# Altium PCB PCB robot V3.PCBDOC (part 3 of 3)
Units mm, origin at the board's own origin, x right, y up, seen from the top; angles counter-clockwise.
Board outline 299.72 x 199.9 mm, 2 copper layers (Top Layer, Bottom Layer); 127 components, 116 nets, 527 pads, 274 vias.
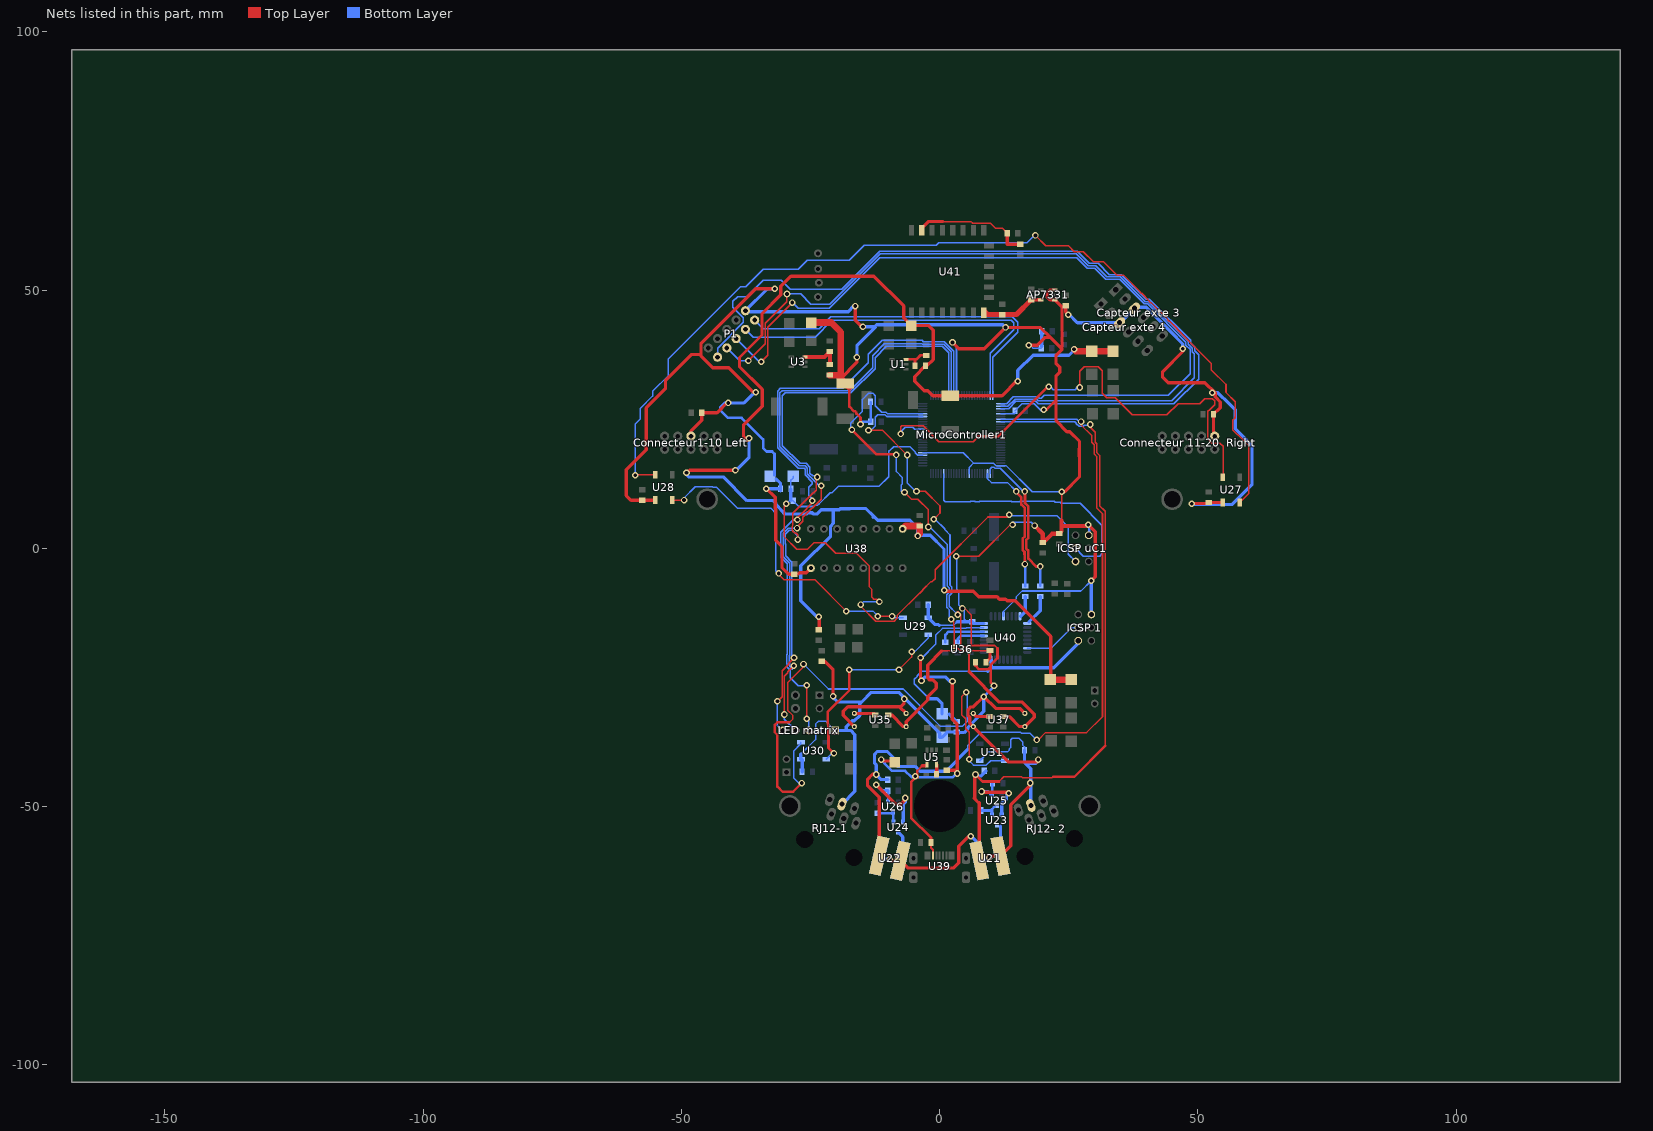
[diagram p3: the nets of this part, all layers, seen from the top]

## Via types
v1: diameter 1.27, hole 0.711, Top Layer to Bottom Layer, 274 vias

## Nets (pads, with @x,y where several pads share a name; then routed paths per layer and width w, separated by ;. In a path a pad name is that pad's centre, name@x,y a point inside that pad or via, vN(x,y) a via of type N, cw(c..) or ccw(c..) an arc to the next point about the centre after c; other vN are vias at no path point) (continued)
NetMicroController1_40: MicroController1.40 U27.din | length 102.1
  Top Layer w0.254: v1(-7.523,22.145) -7.523,23.576 -7.342,23.757 -3.22,23.757 -0.137,20.674 6.451,20.674 7.451,21.674 ; v1@20.864,31.267 v1(21.124,31.267) ; v1(27.127,31.134) 27.127,34.294 27.946,35.112 30.732,35.112 31.423,34.422 31.423,30.021 32.343,29.101 33.996,29.101 37.275,25.822 43.956,25.822 46.16,28.026 50.366,28.026 51.334,28.994 52.738,28.994 53.203,28.529 53.203,27.755 52.32,26.872 52.251,26.872 51.899,26.52 51.899,22.229 51.908,22.22 51.908,21.211 51.899,21.202 52.713,20.388 54.214,20.388 54.843,19.76 54.843,13.808 U27.din@54.8,13.765
  Top Layer w0.5: 7.451,21.674 11.271,21.674 v1@20.864,31.267
  Bottom Layer w0.254: v1@-7.61,22.451 -6.627,23.434 -5.217,23.434 -4.835,23.052 -3.325,23.052 MicroController1.40@-3.295,23.022 ; v1(21.124,31.267) 21.455,31.267 22.023,30.699 26.23,30.699 26.665,31.134 v1(27.127,31.134)
NetMicroController1_45: MicroController1.45 U36.7 | length 67.6
  Top Layer w0.305: v1(-13.787,22.842) -11.082,22.842 -6.306,18.066 v1(-6.271,18.066) ; v1(-4.493,11.036) -2.771,11.036 0.052,8.213 0.052,6.82 v1(-1.156,5.612) ; v1(3.517,-12.886) 3.395,-12.886 3.234,-12.725 3.234,-12.511 3.494,-12.251 4.086,-12.842 4.086,-18.712 4.462,-19.088 4.941,-19.088 5.157,-19.304 5.262,-19.304
  Bottom Layer w0.305: v1@-13.409,22.784 -12.491,23.701 -12.491,25.391 -12.014,25.868 -10.592,25.868 -10.245,25.522 MicroController1.45@-3.295,25.522 ; v1(-6.271,18.066) -6.271,12.651 v1@-4.731,11.11 ; v1@-0.84,5.593 0.965,3.787 0.965,3.626 1.99,2.601 1.99,-7.158 2.325,-7.493 2.325,-8.712 1.854,-9.183 1.854,-11.191 v1@3.177,-12.515
NetMicroController1_46: MicroController1.46 U36.1 | length 74.2
  Top Layer w0.305: v1(-6.814,10.86) -5.44,9.487 -4.226,9.487 -2.183,7.444 v1(-2.183,4.131) ; v1(2.235,-13.76) 2.76,-14.285 2.76,-15.047 2.78,-15.067 U36.1@2.78,-18.81
  Top Layer w0.5: v1(-16.989,22.922) -12.256,18.189 v1@-8.959,18.189
  Bottom Layer w0.305: v1@-17.214,22.961 -17.214,24.273 -14.957,26.529 -14.957,28.822 -13.728,30.051 -12.959,30.051 -12.451,29.543 -12.451,27.593 -11.221,26.363 -10.387,26.363 -10.045,26.022 MicroController1.46@-3.295,26.022 ; v1(-8.38,18.076) -8.38,14.861 -7.285,13.766 -7.285,12.384 -7.417,12.253 -7.417,11.006 -7.271,10.86 v1(-6.814,10.86) ; v1@-2.036,4.22 1.495,0.689 1.495,-7.363 1.83,-7.698 1.83,-8.507 1.359,-8.978 1.359,-11.396 1.823,-11.86 v1@1.823,-13.348
NetMicroController1_58: "LED matrix.5" MicroController1.58 | length 125.3
  Top Layer w0.254: v1@-31.445,-29.603 v1(-31.406,-29.603) -31.327,-29.603 -30.499,-28.775 -30.499,-23.693 -29.231,-22.425 -29.231,-22.235 v1(-28.198,-21.202) ; -30.499,-35.156 -30.396,-35.259 ; v1(-27.458,1.692) -27.458,2.653 -27.728,2.924 -27.994,2.924 -28.401,3.331 -28.401,3.363 -28.567,3.529 -28.567,4.319 -28.401,4.485 -28.401,5.023 -28.487,5.109 -28.487,5.9 -28.401,5.986 -28.401,6.785 -25.039,10.147 -25.033,10.147 -23.927,11.254 -23.927,13.561 v1(-23.681,13.807)
  Bottom Layer w0.254: v1(-31.406,-29.603) -31.406,-34.249 -30.396,-35.259 ; v1@-28.622,-21.29 -28.622,-2.658 -29.824,-1.455 -29.824,0.823 -29.862,0.861 -29.862,2.747 -29.129,3.48 -28.515,3.48 -27.458,2.423 v1(-27.458,1.692) ; v1@-23.705,13.512 -24.196,14.003 -24.594,14.003 -25.166,14.574 -25.166,15.72 -25.877,16.431 -27.022,16.431 -30.47,19.878 -30.47,29.53 -29.926,30.074 -17.244,30.074 -12.522,34.797 -12.522,36.899 -10.317,39.104 0.513,39.104 1.711,37.906 1.755,37.906 MicroController1.58@1.755,29.572
NetMicroController1_59: "LED matrix.4" MicroController1.59 | length 124
  Top Layer w0.254: v1(-30.052,-32.173) -30.052,-24.717 -29.415,-24.081 -29.415,-23.864 v1(-28.277,-22.726) v1@-28.277,-22.682 ; v1@-28.278,-22.726 v1@-28.278,-22.682 ; -27.236,4.452 -26.482,5.205 -26.482,5.975 -22.946,9.511 v1(-22.946,12.13)
  Bottom Layer w0.254: v1(-30.052,-32.173) -30.052,-33.063 -27.856,-35.259 ; -28.471,-23.377 -28.498,-23.377 -29.055,-22.82 -29.055,-22.259 -29.15,-22.165 -29.15,-20.808 -29.066,-20.723 -29.066,-2.842 -30.268,-1.639 -30.268,0.64 -30.306,0.677 -30.306,2.931 -29.313,3.924 v1(-27.613,3.924) v1@-27.738,3.798 ; v1@-22.932,11.883 -23.107,11.883 -25.613,14.389 -25.613,15.535 -26.062,15.984 -27.207,15.984 -30.917,19.693 -30.917,30.083 -30.479,30.521 -17.43,30.521 -12.969,34.982 -12.969,37.312 -10.719,39.562 -3.359,39.562 -3.349,39.551 0.743,39.551 2.255,38.039 MicroController1.59@2.255,29.572
NetMicroController1_60: "LED matrix.3" MicroController1.60 | length 125.4
  Top Layer w0.254: v1(-27.533,5.505) -27.533,5.893 -26.745,6.68 -26.745,6.695 -24.63,8.811 -24.643,8.824 v1(-24.643,9.192) ; v1(-25.76,-26.493) -25.76,-32.608 v1@-25.414,-32.955
  Bottom Layer w0.254: v1(-27.533,5.505) -28.373,5.505 -30.187,3.691 -30.187,3.678 -30.75,3.115 -30.75,0.493 -30.712,0.456 -30.712,-1.823 -29.51,-3.025 -29.51,-20.539 -29.594,-20.624 -29.594,-22.349 -29.499,-22.443 -29.499,-23.004 -28.915,-23.589 -28.915,-25.012 -27.357,-26.57 v1@-25.645,-26.57 ; v1(-25.76,-33.013) -25.316,-33.457 -25.316,-35.259 ; v1@-24.947,8.789 -24.694,9.042 -24.694,9.643 -25.341,10.291 -25.341,11.823 -24.694,12.471 -24.694,12.838 -26.06,14.204 -26.06,15.349 -26.247,15.537 -27.393,15.537 -31.364,19.508 -31.364,30.445 -30.84,30.968 -18.728,30.968 -13.815,35.882 -13.815,37.571 -11.139,40.247 -3.413,40.247 -3.164,39.998 0.928,39.998 2.755,38.171 MicroController1.60@2.755,29.572
NetMicroController1_74: MicroController1.74 P1.7 | length 70
  Bottom Layer w0.254: P1.7@-37.612,42.388 -36.13,40.906 -24.133,40.906 -20.926,44.114 13.851,44.114 14.289,43.676 14.289,42.294 9.755,37.76 MicroController1.74@9.755,29.572
NetMicroController1_75: MicroController1.75 P1.9 | length 69.2
  Bottom Layer w0.254: P1.9@-35.816,44.184 -34.181,42.549 -23.333,42.549 -21.053,44.829 14.048,44.829 15.091,43.786 15.091,41.813 10.255,36.977 MicroController1.75@10.255,29.572
NetMicroController1_76: MicroController1.76 P1.5 | length 153.9
  Top Layer w0.254: v1(-34.522,36.137) -33.315,37.344 -33.315,42.824 v1(-28.56,47.579)
  Bottom Layer w0.254: P1.5@-39.408,40.592 -34.952,36.137 v1(-34.522,36.137) ; v1(-28.56,47.579) -28.491,47.579 -27.353,46.441 -21.426,46.441 -11.569,56.297 26.524,56.297 28.575,54.247 30.032,54.247 32.181,52.098 34.815,52.098 39.6,47.313 40.237,47.313 47.669,39.881 47.669,39.327 48.475,38.521 48.475,33.792 44.275,29.592 20.201,29.592 19.665,29.056 19.271,29.056 18.993,29.335 14.247,29.335 12.934,28.022 MicroController1.76@11.805,28.022
NetMicroController1_77: MicroController1.77 P1.3 | length 158.6
  Top Layer w0.254: v1@-37.025,36.114 v1(-37.025,36.322) -33.761,39.586 -33.761,43.556 -29.559,47.758 v1(-29.559,49.232)
  Bottom Layer w0.254: P1.3@-41.204,38.796 -38.73,36.322 v1(-37.025,36.322) ; v1(-29.559,49.232) -26.94,49.232 -24.941,47.234 -21.265,47.234 -11.493,57.006 26.448,57.006 28.76,54.694 30.217,54.694 32.366,52.545 34.996,52.545 39.784,47.757 40.421,47.757 48.113,40.065 48.113,39.511 48.919,38.705 48.919,38.053 49.295,37.676 49.295,32.986 44.886,28.577 19.123,28.577 18.809,28.891 14.581,28.891 13.211,27.522 MicroController1.77@11.805,27.522
NetMicroController1_78: MicroController1.78 P1.1 | length 164.9
  Bottom Layer w0.254: P1.1@-42.413,37.587 P1.1@-43,37 -43,38.77 -37.984,43.787 -37.984,44.642 -40.027,46.686 -40.027,47.79 -39.11,48.707 -37.323,48.707 -34.151,51.88 -30.662,51.88 -28.949,50.167 -18.964,50.167 -11.634,57.497 26.589,57.497 28.945,55.141 30.676,55.141 32.825,52.992 35.177,52.992 39.968,48.201 40.605,48.201 48.557,40.249 48.557,39.695 49.363,38.889 49.363,38.241 50.101,37.503 50.101,32.736 45.335,27.97 19.102,27.97 18.625,28.447 14.769,28.447 13.344,27.022 MicroController1.78@11.805,27.022
NetMicroController1_82: MicroController1.82 R28.1 U22.gndReceiver | length 152.8
  Top Layer w0.254: v1@18.334,-36.978 18.446,-37.089 v1(18.779,-37.089) ; 27.369,23.872 v1(27.369,24.543)
  Top Layer w0.305: v1(18.779,-37.089) 19.074,-37.089 20.498,-35.665 28.437,-35.665 31.509,-32.594 31.509,6.697 30.368,7.839 30.368,17.793 29.899,18.262 29.899,20.054 29.413,20.539 29.413,21.828 27.369,23.872
  Top Layer w0.635: v1@-12.214,-43.756 -13.004,-43.756 -13.957,-44.709 -13.957,-45.941 -11.717,-48.181 U22.gndReceiver@-11.717,-59.528
  Bottom Layer w0.254: MicroController1.82@11.805,25.022 26.512,25.022 v1@27.335,24.199 ; v1@18.313,-37.089 v1(18.779,-37.089)
  Bottom Layer w0.305: 5.469,-38.933 5.469,-38.115 8.005,-35.58 15.585,-35.58 15.842,-35.837 17.528,-35.837 v1(18.779,-37.089)
  Bottom Layer w0.635: R28.1@-10.038,-44.766 -11.297,-44.766 v1(-12.283,-43.779) -12.283,-41.938 -12.604,-41.617 -12.604,-39.856 -12.08,-39.332 -10.151,-39.332 -8.746,-40.736 -8.746,-41.596 -8.117,-42.225 -4.76,-42.225 -3.817,-43.168 1.234,-43.168 5.469,-38.933
NetMicroController1_83: MicroController1.83 R27.1 U21.gndReceiver | length 128.4
  Top Layer w0.254: v1@29.146,23.441 v1(29.146,23.965)
  Top Layer w0.305: 11.5,-45.133 12.414,-44.22 14.611,-44.22 14.621,-44.229 15.843,-44.229 16.062,-44.448 17.112,-44.448 17.117,-44.443 17.928,-44.443 17.933,-44.448 21.748,-44.448 21.976,-44.22 ; v1@29.146,23.441 30.124,22.463 30.124,20.531 30.395,20.26 30.395,18.531 30.946,17.979 30.946,8.253 32.032,7.167 32.032,-38.255
  Top Layer w0.5: v1(6.93,-43.779) 8.284,-45.133 11.5,-45.133 ; 21.976,-44.22 26.058,-44.22 32.022,-38.255
  Top Layer w0.635: 6.66,-48.357 7.513,-49.21 ; 6.813,-48.369 v1@6.813,-43.896 ; U21.gndReceiver@7.666,-60.437 7.666,-49.222
  Bottom Layer w0.254: MicroController1.83@11.805,24.522 26.111,24.522 26.417,24.216 ; 26.417,24.148 26.975,23.591 27.763,23.591 27.979,23.806 27.998,23.787 v1@28.547,23.787
  Bottom Layer w0.635: v1@7.231,-44.081 7.97,-44.081 R27.1@8.985,-43.066
NetR1_1: R1.1 R3.2 U1.3 | length 7.9
  Top Layer w0.508: U1.3@-6.548,36.584 -4.528,36.584 -3.766,37.347 -2.607,37.347 R3.2@-2.604,37.344 -3.757,37.344 -4.783,36.318 R1.1@-4.783,35.301
NetR5_1: R5.1 R6.2 U3.3 | length 7.7
  Top Layer w0.8: U3.3@-26.043,37.034 -22.272,37.034 -21.258,38.047 R5.1@-21.258,35.564
NetR9_1: R9.1 U5.5 | length 1.8
  Top Layer w0.635: R9.1@-0.589,-43.69 U5.5@-0.589,-41.863
NetR29_2: R29.2 U23.1 U25.3 | length 3.9
  Bottom Layer w0.5: U23.1@10.124,-51.6 10.124,-50.508 10.62,-50.012
  Bottom Layer w0.635: R29.2@7.998,-50.75 10.09,-50.75
NetR30_2: R30.2 U24.1 U26.3 | length 5
  Bottom Layer w0.5: R30.2@-11.991,-51.307 -9.303,-51.307 U26.3@-9.045,-51.049 -8.977,-51.118 U24.1@-8.977,-52.988
NetR31_2: R31.2 U23.2 U25.1 | length 14.2
  Top Layer w0.635: v1@8.273,-47.242 v1@13.383,-47.242
  Bottom Layer w0.5: U25.1@10.205,-47.504 R31.2@10.205,-45.484
  Bottom Layer w0.635: v1(8.106,-47.075) 9.369,-47.075 U25.1@10.114,-47.82 ; U23.2@12.024,-51.6 12.024,-49.382 12.946,-48.461 12.946,-47.818 v1(13.383,-47.381)
NetR32_2: R32.2 U24.2 U26.1 | length 17.6
  Top Layer w0.635: v1(-12.293,-45.765) -8.573,-49.485 -7.458,-49.485 -6.649,-48.676 v1(-6.649,-48.334)
  Bottom Layer w0.5: v1@-12.154,-45.858 v1@-11.968,-45.858 ; U26.1@-9.995,-49.049 R32.2@-9.995,-47.027
  Bottom Layer w0.635: v1(-12.293,-45.765) -11.108,-46.951 R32.2@-10.072,-46.951 ; U24.2@-7.077,-52.988 -7.077,-49.569 -6.649,-49.141 v1(-6.649,-48.334)
NetR33_2: R33.2 U35.4 U36.3 | length 26.1
  Top Layer w0.305: 0.395,-19.87 0.455,-19.81 U36.3@2.78,-19.81
  Top Layer w0.635: R33.2@-9.98,-32.248 -9.302,-32.248 -7.05,-34.5 U35.4@-6.5,-34.5 -6.5,-33.529 -2.334,-29.363 -2.334,-28.734 -0.65,-27.05 -0.65,-26.101 -1.32,-25.431 -2.003,-25.431 -2.334,-25.099 -2.334,-22.6 0.395,-19.87
NetR34_2: R34.2 U35.2 | length 4.1
  Top Layer w0.635: U35.2@-16.5,-31.96 -12.763,-31.96 R34.2@-12.475,-32.248
NetR35_2: R35.2 U37.2 | length 3.4
  Top Layer w0.635: U37.2@6.5,-31.96 7.113,-32.573 R35.2@9.665,-32.573
NetR36_2: R36.2 U36.5 U37.4 | length 27.7
  Top Layer w0.305: 5.68,-23.905 U36.5@5.68,-20.31
  Top Layer w0.635: 5.68,-23.905 11.531,-29.756 15.968,-29.756 18.31,-32.098 18.31,-32.69 U37.4@16.5,-34.5 15.45,-34.5 13.518,-32.568 R36.2@12.33,-32.568
NetR41_1: R41.1 U40.30 | length 9.1
  Bottom Layer w0.508: R41.1@1.1,-18.159 1.1,-16.755 1.711,-16.145 U40.30@8.558,-16.145
NetR42_1: R42.1 U40.8 | length 4.2
  Bottom Layer w0.635: U40.8@15.677,-13.145 16.567,-12.255 R42.1@16.567,-9.328
NetR43_1: R43.1 U40.9 | length 5.8
  Bottom Layer w0.635: 17.282,-14.263 19.46,-12.085 R43.1@19.46,-9.328
NetR44_2: R44.2 U40.29 | length 5.9
  Bottom Layer w0.508: R44.2@3.527,-18.161 3.527,-17.49 4.073,-16.945 U40.29@8.558,-16.945
NetR51_2: R51.2 R52.1 U41.21 | length 23
  Top Layer w0.305: 0.642,63.25 6.073,63.25 6.399,62.924 9.851,62.924 10.807,61.969 12.136,61.969 R51.2@13.087,61.018
  Top Layer w0.635: U41.21@-3.483,61.741 -3.483,61.961 -2.194,63.25 0.642,63.25 ; R51.2@13.087,61.018 13.087,58.866 13.071,58.85 R52.1@15.601,58.85
NetU21_gndEmitter: U21.gndEmitter U23.3 | length 5.8
  Bottom Layer w0.635: U21.gndEmitter@11.774,-59.563 11.774,-53.782
NetU22_gndEmitter: U22.gndEmitter U24.3 | length 6
  Bottom Layer w0.635: U24.3@-8.027,-54.988 -7.148,-55.867 -7.148,-59.996 U22.gndEmitter@-7.625,-60.472
NetU27_dout: U27.dout U28.din | length 185.1
  Top Layer w0.305: v1@-58.859,14.315 -58.783,14.24 U28.din@-55.075,14.24 ; v1(18.53,60.57) 20.516,58.584 24.912,58.584 26.067,57.429 27.806,57.429 29.777,55.458 31.719,55.458 34.289,52.888 35.57,52.888 38.784,49.674 38.784,49.57 38.985,49.369 39.089,49.369 40.581,47.878 40.581,47.773 40.781,47.573 40.885,47.573 42.377,46.082 42.377,45.977 42.577,45.777 42.681,45.777 44.173,44.286 44.173,44.181 44.373,43.981 44.477,43.981 45.969,42.49 45.969,42.385 47.817,40.537 47.831,40.537 52.59,35.778 52.59,34.542 55.421,31.711 55.421,30.183 57.206,28.398 57.206,25.482 57.173,25.448 57.173,25.229 56.728,24.785 56.728,22.899 57.612,22.016 57.687,22.016 59.789,19.914 59.789,10.553 U27.dout@58.1,8.865
  Bottom Layer w0.305: v1(-58.925,14.149) -58.925,24.075 -57.966,25.035 -57.966,27.086 -55.583,29.469 -55.583,30.395 -52.506,33.472 -52.506,36.679 -38.541,50.644 -37.551,50.644 -34.177,54.018 -27.394,54.018 -25.64,55.772 -17.516,55.772 -14.605,58.683 -0.66,58.683 -0.197,59.147 16.909,59.147 v1@18.133,60.371
NetU28_dout: U28.dout U29.din | length 63.4
  Top Layer w0.305: U28.dout@-51.775,9.34 v1(-49.483,9.34) ; v1(-31.174,-4.862) -31.174,-5.046 -30.171,-6.049 -24.205,-6.049 v1@-17.922,-12.331 ; v1@-12.069,-12.986 -11.91,-13.145 v1(-9.222,-13.145)
  Bottom Layer w0.305: v1(-49.483,9.34) -49.483,9.761 -47.302,11.942 -43.988,11.942 -43.87,11.825 -43.209,11.825 -39.121,7.736 -32.637,7.736 -31.714,6.813 -31.714,-4.322 v1(-31.174,-4.862) ; v1(-18.08,-12.15) -12.928,-12.15 v1@-12.081,-12.998 ; v1(-9.222,-13.145) -8.945,-13.422 U29.din@-7.107,-13.422
  other v1: -11.979,-13.145
NetU29_dout: U29.dout U30.din | length 39.4
  Top Layer w0.305: -21.548,-36.311 -21.528,-36.331 ; v1(-7.876,-23.48) -5.435,-21.04 v1(-5.435,-20.024)
  Top Layer w0.5: -21.641,-33.963 -21.641,-31.629 -17.488,-27.476 v1(-17.488,-23.48) ; -21.548,-36.311 -21.548,-34.055 ; -21.528,-36.331 -21.528,-38.62 v1(-20.469,-39.68)
  Bottom Layer w0.305: U30.din@-21.972,-40.815 -20.837,-39.68 v1(-20.469,-39.68) ; v1@-17.661,-23.653 v1(-17.488,-23.48) v1(-7.876,-23.48) ; v1@-5.175,-20.348 -2.207,-17.38 U29.dout@-2.207,-16.722
NetU30_dout: U30.dout U31.din | length 107.7
  Top Layer w0.305: -29.103,-33.707 -28.416,-33.02 -28.416,-32.357 -29.439,-31.334 -29.439,-26.006 -27.87,-24.437 -27.87,-24.432 v1@-26.12,-22.681 ; v1@5.078,-27.895 4.237,-28.736 4.237,-32.193 5.025,-32.981 5.025,-34.939 5.706,-35.62 v1(5.706,-40.801)
  Top Layer w0.5: -29.103,-33.707 -31.447,-33.707 -31.932,-34.192 -31.932,-35.605 -31.419,-36.118 -31.419,-46.108 -30.407,-47.121 -28.381,-47.121 v1(-26.705,-45.445)
  Bottom Layer w0.305: v1@-27.05,-45.675 -28.275,-44.45 -28.275,-39.246 -26.872,-37.843 U30.dout@-26.872,-37.515 ; v1(-26.368,-22.401) -21.537,-27.231 -7.074,-27.231 0.165,-34.47 4.369,-34.47 5.329,-33.509 5.329,-28.082 v1(5.121,-27.874) ; v1@5.642,-41.067 6.536,-41.961 9.025,-41.961 9.874,-41.112 U31.din@12.635,-41.112
RESET: "ICSP uC1.5" C25.1 D12.1 MicroController1.30 R47.1 | length 138.3
  Top Layer w0.305: v1(-29.682,8.657) -30.059,8.279 -30.059,2.206 -27.685,-0.169 -25.583,-0.169 -24.33,1.084 -22.154,1.084 -20.106,-0.963 -16.097,-0.963 -13.674,-3.387 -13.674,-7.396 -13.12,-7.949 -13.12,-9.479 -12.759,-9.84 -12.188,-9.84 v1(-11.662,-10.366) ; v1@-15.255,-11.201 -15.255,-11.253 -12.384,-14.124 -8.816,-14.124 -8.242,-13.551 -8.242,-13.01 -3.911,-8.678 -3.844,-8.678 -3.271,-8.105 -3.271,-8.038 -1.675,-6.443 -1.453,-6.443 -0.879,-5.869 -0.879,-4.15 9.334,6.064 13.354,6.064 13.484,6.193 v1(13.484,6.491)
  Bottom Layer w0.305: v1(-29.682,8.657) -29.089,9.249 -28.807,9.249 C25.1@-28.336,9.249 ; R47.1@-28.807,11.498 -28.807,13.181 -28.36,13.628 D12.1@-28.36,13.945 ; C25.1@-28.258,9.07 -27.281,8.093 -24.36,8.093 -24.085,8.368 -23.612,8.368 -23.398,8.582 -23.35,8.582 -21.161,10.771 -20.845,10.771 -19.61,12.006 -11.747,12.006 -9.881,13.872 -9.881,18.865 -9.714,18.865 -8.908,19.671 -5.763,19.671 -4.748,18.656 ; v1(-15.255,-10.885) -14.736,-10.366 v1(-11.662,-10.366) ; -4.748,18.513 -4.257,18.022 MicroController1.30@-3.295,18.022 ; v1@13.263,6.267 22.754,6.267 24.879,4.142 24.879,-1.133 26.307,-2.561
  Bottom Layer w0.635: C25.1@-28.807,9.249 R47.1@-28.807,11.498
"RESET 16": "ICSP 1.5" D13.1 R48.1 U40.24 | length 48.7
  Bottom Layer w0.305: -2.029,-29.105 -4.904,-26.231 -4.904,-25.344 -4.349,-24.789 -4.349,-24.675 -3.472,-23.798 -1.199,-23.798 -1.169,-23.827 9.253,-23.827 9.282,-23.798
  Bottom Layer w0.635: -2.029,-29.105 -0.504,-29.105 0.461,-30.071 D13.1@0.461,-32.056 ; 1.784,-32.056 R48.1@3.268,-33.54 ; 9.282,-23.798 9.958,-23.122 ; U40.24@9.958,-21.545 9.958,-23.122 ; 26.821,-17.886 26.821,-18.383 22.082,-23.122 9.958,-23.122
SCK: "ICSP uC1.3" MicroController1.20 | length 49.5
  Bottom Layer w0.254: MicroController1.20@0.755,14.472 0.785,14.442 0.785,9.325 1.062,9.048 5.894,9.048 5.973,9.126 6.827,9.126 6.906,9.048 7.694,9.048 7.773,9.126 9.12,9.126 9.147,9.099 10.714,9.099 10.741,9.126 11.236,9.126 11.244,9.118 12.811,9.118 12.819,9.126 13.808,9.126 13.906,9.028 14.535,9.028 14.553,9.011 15.49,9.011 15.605,9.126 15.66,9.126 15.666,9.121 17.232,9.121 17.238,9.126 22.187,9.126 22.383,8.93 23.33,8.93 23.555,8.705 27.184,8.705 31.419,4.47 31.419,1.394 31.506,1.307 31.506,-0.944 30.959,-1.491 27.777,-1.491 26.307,-0.021
"SCK 16": "ICSP 1.3" U40.15 | length 11.5
  Bottom Layer w0.305: U40.15@16.958,-19.345 21.554,-19.345 25.552,-15.346 26.821,-15.346
SELIAL_RX: MicroController1.2 R43.2 | length 29.7
  Top Layer w0.508: v1@16.347,11.01 16.505,10.851 16.505,8.753 17.174,8.084 17.174,2.033 16.754,1.613 16.754,-0.026 17.11,-0.382 17.11,-0.85 17.174,-0.914 17.174,-2.018 18.664,-3.508 v1(19.443,-3.508)
  Bottom Layer w0.254: MicroController1.2@9.785,14.442 MicroController1.2@9.755,14.472 9.785,14.502 9.785,15.416 10.061,15.692 10.517,15.692 10.659,15.549 11.735,15.549 15.913,11.371 v1@15.913,11.127
  Bottom Layer w0.508: R43.2@19.443,-7.278 v1(19.443,-3.508)
  other v1: 16.449,11.011
SERIAL_TX: MicroController1.3 R42.2 | length 26.3
  Top Layer w0.508: v1@14.728,10.901 15.805,9.825 15.805,8.463 16.474,7.794 16.474,2.323 16.054,1.903 16.054,-0.316 16.41,-0.672 16.41,-1.14 16.474,-1.204 16.474,-2.308 16.579,-2.413
  Bottom Layer w0.305: MicroController1.3@9.255,14.472 9.26,14.467 9.26,13.491 10.018,12.732 13.115,12.732 14.707,11.14 v1@14.707,10.964
  Bottom Layer w0.508: v1(16.501,-3.051) 16.579,-3.13 R42.2@16.579,-7.283
  other v1: 14.821,11.016
"VCC 3.3V": AP7331.5 C6.2 C29.1 U41.8 | length 12.5
  Top Layer w0.635: C6.2@17.737,48.101 AP7331.5@19.635,48.101
  Top Layer w1: U41.8@8.575,45.915 9.251,45.239 C29.1@12.108,45.239 14.875,45.239 C6.2@17.737,48.101
"VCC 5V": "Capteur exte 3.3" "Capteur exte 4.3" "Connecteur1-10 Left.6" "Connecteur 11-20  Right.2" "ICSP 1.2" "ICSP uC1.2" "LED matrix.1" "RJ12- 2.3" AP7331.1 AP7331.3 C4.1 C5.1 C9.1 C10.1 C11.1 C12.1 C13.1 C17.2 C20.1 C23.2 C26.1 C30.1 C31.1 D2.1 D12.2 D13.2 LD2.A MicroController1.10 MicroController1.31 MicroController1.61 MicroController1.80 MicroController1.100 P1.10 pullUpSCL.1 pullUpSDA.1 R5.2 R5V.2 R37.2 R45.2 R46.2 R47.2 R48.2 RJ12-1.3 U21.VCC U22.VCC U27.VCC U28.VCC U29.VCC U30.VCC U31.VCC U35.1 U35.3 U36.8 U37.1 U37.3 U38.9 U40.4 U40.32 | length 838.3
  Top Layer w0.305: v1(3.229,-1.537) 7.549,-1.537 v1@13.692,4.606 ; v1@4.608,-11.375 6.13,-12.897 6.13,-18.81 10.652,-18.81 11.18,-19.338 ; R46.2@23.103,2.812 R46.2@23.17,2.88 R46.2@23.602,3.312 ; 23.602,5.374 v1(23.602,10.951) ; v1@28.579,4.352 v1(28.785,4.558)
  Top Layer w0.508: D2.1@-17.478,31.194 -17.478,27.432 -16.556,26.509 -16.4,26.509 -16.139,26.248 -16.139,26.092 -15.335,25.289 v1(-15.335,24.012) ; R37.2@6.908,-22.095 6.908,-22.715 7.603,-23.41 9.399,-23.41 9.894,-22.915 ; v1(10.508,-26.619) 9.894,-26.005 9.894,-22.915 ; 11.18,-19.338 11.18,-21.25 9.894,-22.536 9.894,-22.915 ; v1(20.125,26.846) 20.67,26.846 22.527,28.703
  Top Layer w0.635: U28.VCC@-55.095,9.32 C11.1@-57.57,9.32 -59.77,9.32 -60.661,10.211 -60.661,15.19 -56.786,19.065 -56.786,27.169 -53.097,30.858 -53.097,32.42 -47.99,37.527 -46.195,37.527 ; -48.16,21.72 -48.16,22.647 -46.04,24.767 C31.1@-46.04,26.25 -43.105,26.25 v1@-41.076,28.279 ; v1(-35.599,30.206) -36.106,30.206 -40.84,34.94 -43.95,34.94 -46.195,37.184 -46.195,37.527 ; v1@-33.62,11.663 -31.82,9.863 -31.82,7.771 -31.715,7.667 -31.715,1.52 -30.528,0.333 -30.528,-3.741 -29.249,-5.019 C17.2@-28.15,-5.019 ; v1(-31.913,50.257) -35.564,50.257 -35.599,50.291 -46.195,39.695 -46.195,37.527 ; -27.351,-4.971 -27.132,-4.751 -25.845,-4.751 U38.9@-24.94,-3.845 ; R5V.2@-22.869,-21.838 -22.282,-21.838 -20.646,-23.473 v1(-20.646,-28.639) ; D2.1@-19.153,32.869 -16.021,36.002 v1(-16.021,36.987) ; -18.658,-32.341 -18.658,-31.551 -17.756,-30.649 -7.811,-30.649 U35.3@-6.5,-31.96 ; -18.563,-32.437 U35.1@-16.5,-34.5 ; v1(-16.322,46.898) -16.322,44.134 v1@-15.003,42.815 ; v1@-9.692,-60.099 -9.319,-60.472 U22.VCC@-7.625,-60.472 -6.22,-61.878 2.711,-61.878 3.708,-60.881 3.708,-57.644 v1@5.561,-55.792 ; -7.569,-30.649 -6.89,-29.97 v1(-6.89,-29.156) ; v1(2.476,39.853) 3.67,38.659 8.649,38.659 v1(12.745,42.755) ; v1@8.38,-28.861 6.531,-30.71 6.005,-30.71 5.49,-31.225 5.49,-32.378 5.82,-32.708 5.82,-33.82 U37.1@6.5,-34.5 13.378,-41.378 18.912,-41.378 19.089,-41.202 v1(19.089,-40.886) ; v1(8.533,-28.708) 10.811,-30.987 15.527,-30.987 U37.3@16.5,-31.96 ; v1(9.602,-59.846) 9.884,-59.563 U21.VCC@11.774,-59.563 13.731,-57.606 13.731,-49.675 v1@17.454,-45.952 ; v1@13.045,42.748 19.455,42.748 21.386,40.817 ; v1(17.234,39.328) 18.917,39.328 20.407,40.817 21.386,40.817 ; AP7331.3@22.251,49.997 21.287,49.997 20.844,49.553 20.844,48.6 21.347,48.097 AP7331.1@22.251,48.097 23.683,46.664 23.683,38.52 ; v1(23.602,10.951) 24.164,10.951 27.067,13.854 27.067,17.732 27.003,17.796 27.003,19.324 27.067,19.388 27.067,20.694 25.209,22.552 24.632,22.552 22.527,24.656 22.527,28.703 22.527,33.399 23.224,34.096 23.224,35.045 22.527,35.742 22.527,37.364 23.683,38.52 ; C5.1@24.399,46.938 24.399,45.741 v1(24.916,45.225) ; v1(28.785,4.558) 30.118,3.225 30.118,-5.496 v1(29.35,-6.264) ; v1@47.099,38.388 47.099,38.161 43.142,34.204 43.142,33.133 44.212,32.063 51.347,32.063 53.319,30.091 53.319,29.313 54.306,28.326 54.306,27.239 C30.1@52.987,25.919 52.987,21.973 ; v1(48.782,8.657) 51.882,8.657 C12.1@52.08,8.855 54.79,8.855 U27.VCC@54.8,8.865 ; 21.386,40.817 23.683,38.52
  Top Layer w0.8: v1(18.366,4.411) 19.951,2.826 19.951,1.004 21.759,2.812 R46.2@23.103,2.812 ; R46.2@23.602,3.312 23.602,5.374 ; 23.66,4.352 v1@28.579,4.352
  Top Layer w1.27: C4.1@-24.894,43.709 -21.009,43.709 -19.153,41.854 D2.1@-19.153,32.869 ; R5.2@-21.258,33.532 -19.816,33.532 D2.1@-19.153,32.869 ; D2.1@-17.478,31.194 D2.1@-19.153,32.869
  Bottom Layer w0.305: -26.872,-39.866 -24.031,-37.025 -24.031,-34.026 -23.511,-33.506 -21.989,-33.506 -20.236,-35.259 ; pullUpSCL.1@-13.367,24.551 -13.367,26.508 ; MicroController1.31@-3.295,18.522 4.541,18.522 6.554,16.509 ; -0.093,-14.92 2.691,-14.92 3.388,-14.222 ; v1(2.476,39.853) 3.255,39.074 MicroController1.61@3.255,29.572 ; v1@3.3,-1.907 3.3,-8.042 3.664,-8.405 3.664,-10.946 4.778,-12.06 4.778,-13.729 5.272,-14.222 ; MicroController1.10@5.755,14.472 5.755,15.71 6.554,16.509 ; U31.VCC@7.735,-41.112 9.432,-39.415 13.138,-39.415 13.431,-39.122 13.431,-38.863 13.74,-38.554 13.74,-37.047 14.023,-36.764 15.37,-36.764 16.046,-37.441 16.046,-38.066 16.432,-38.452 C9.1@16.432,-39.095 ; MicroController1.80@11.805,26.022 14.473,26.022 C26.1@14.678,26.227 ; U40.4@12.358,-13.145 12.358,-12.232 14.794,-9.795 14.794,-9.418 15.945,-8.267 27.347,-8.267 v1(29.35,-6.264) ; v1(14.106,4.594) 14.106,4.952 14.024,5.034 17.743,5.034 v1(18.366,4.411) ; C26.1@14.56,26.621 15.912,27.973 18.31,27.973 v1@19.744,26.539 ; v1@17.172,39.636 18.043,38.765 LD2.A@19.678,38.765 ; v1(23.602,10.951) 17.923,10.951 12.852,16.022 MicroController1.100@11.805,16.022 11.803,16.024 10.852,16.024 10.367,16.509 6.554,16.509 ; 28.785,2.581 28.924,2.72
  Bottom Layer w0.508: v1(-40.941,28.143) -41.651,28.143 -42.501,27.294 -42.501,26.77 -40.985,25.254 -38.352,25.254 -34.161,21.063 -34.161,19.376 -33.528,18.744 -32.439,18.744 -31.98,18.285 D12.2@-31.98,14.112 ; v1(-15.335,24.012) -14.821,24.526 pullUpSCL.1@-13.341,24.526 pullUpSDA.1@-13.341,28.294 ; v1(8.533,-28.708) 10.508,-26.733 v1(10.508,-26.619) ; 28.924,2.72 v1@28.924,4.465
  Bottom Layer w0.635: v1(-40.941,28.143) -37.864,28.143 v1@-35.97,30.037 ; v1(-33.581,11.545) R47.2@-30.879,11.545 ; v1(-31.913,50.257) -33.335,50.257 P1.10@-37.612,45.98 -37.435,45.803 -17.716,45.803 v1@-16.596,46.923 ; -31.656,13.404 -30.8,12.548 R47.2@-30.8,11.122 ; U30.VCC@-26.872,-40.815 -26.872,-39.866 ; C10.1@-26.633,-43.257 U30.VCC@-26.633,-40.952 ; v1@-20.582,-28.927 -19.758,-29.751 -15.119,-29.751 ; -20.236,-35.259 -18.109,-35.259 ; RJ12-1.3@-18.903,-49.511 -16.438,-47.046 -16.438,-36.08 -17.259,-35.259 -18.109,-35.259 ; v1(-16.021,36.987) -16.021,39.192 -12.458,42.755 ; v1(-14.854,42.914) -12.617,42.914 -12.23,43.301 12.2,43.301 v1(12.745,42.755) ; U22.VCC@-11.717,-59.528 -11.061,-60.184 v1(-9.671,-60.184) ; U29.VCC@-2.207,-13.422 -0.871,-14.758 -0.254,-14.758 -0.093,-14.92 ; U29.VCC@-2.197,-13.412 C13.1@-2.197,-10.927 ; 3.388,-14.222 5.272,-14.222 C23.2@6.28,-14.222 6.602,-14.545 U40.32@8.558,-14.545 ; v1@6.07,-55.751 6.111,-55.751 7.666,-57.306 U21.VCC@7.666,-60.437 9.053,-60.437 v1@9.496,-59.994 ; v1(8.533,-28.708) 8.533,-31.582 5.428,-34.686 5.428,-34.96 4.724,-35.663 3.36,-35.663 R48.2@3.268,-35.572 1.445,-35.572 D13.2@0.461,-36.556 -0.005,-36.556 -0.005,-35.839 -7.952,-27.891 -13.26,-27.891 -15.119,-29.751 ; C9.1@16.432,-39.095 16.432,-41.44 16.425,-41.447 16.579,-41.6 ; 17.648,-49.781 17.648,-42.67 16.579,-41.6 ; v1@19.09,-41.133 18.623,-41.6 16.579,-41.6 ; LD2.A@19.761,39.085 C20.1@19.761,42.053 ; v1@25.033,45.313 26.659,43.687 34.803,43.687 ; 29.361,-12.806 v1@29.361,-6.684 ; 34.932,43.687 37.657,46.412 ; 37.681,46.47 37.89,46.678 39.974,46.678 44.692,41.961 44.692,41.898 47.035,39.555 v1(47.035,38.615) ; v1@49.091,8.585 49.186,8.49 56.639,8.49 60.451,12.303 60.451,19.913 57.218,23.146 57.218,26.84 56.065,27.992 56.019,27.992 53.869,30.143 v1(52.781,30.143) ; -18.109,-35.259 -18.109,-34.565 -16.929,-33.385 -16.5,-33.385 -15.492,-32.377 -15.492,-30.124 -15.119,-29.751
  other v1: 6.029,-55.731 17.522,-45.422 4.401,-11.633
"VCC 5V USB": C7.1 C19.2 LD1.A U5.4 U39.1 U40.31 | length 87
  Top Layer w0.305: v1@-4.401,-44.203 v1@-4.344,-44.146 ; -4.344,-43.089 -3.364,-42.109
  Top Layer w0.4: C19.2@-1.694,-56.951 -1.694,-57.919 -1.3,-58.313 U39.1@-1.3,-59.48
  Top Layer w0.508: v1@-10.925,-41.16 -8.938,-41.16 C7.1@-8.728,-41.37 ; v1(-4.707,-44.14) -4.466,-44.14 -4.306,-44.3 -4.567,-44.3 -5.509,-45.242 -5.509,-52.164 -1.694,-55.979 C19.2@-1.694,-56.951 ; v1@-4.344,-44.146 -4.344,-43.089
  Top Layer w0.635: v1(-3.699,-21.198) -3.699,-25.469 v1(-3.526,-25.642) ; -3.364,-42.109 -2.736,-42.109 U5.4@-2.489,-41.863 ; LD1.A@1.375,-42.971 3.049,-42.971 ; v1(2.475,-25.736) 2.454,-25.758 2.454,-33.095 3.334,-33.975 3.334,-35.494 3.398,-35.559 v1(3.398,-43.589)
  Bottom Layer w0.305: v1@-3.592,-21.358 -0.793,-18.558 -0.793,-16.845 0.55,-15.502 5.076,-15.502 5.234,-15.345 U40.31@8.558,-15.345
  Bottom Layer w0.508: v1(-11.306,-40.885) -10.696,-41.495 -10.696,-41.61 -9.236,-43.07 -6.668,-43.07 -5.439,-44.3 2.533,-44.3 v1@3.321,-43.512
  Bottom Layer w0.635: v1(-3.526,-25.642) -2.774,-24.89 1.078,-24.89 1.924,-25.736 v1(2.475,-25.736)
"VCC 8V": C2.1 C18.1 D1.1 D4.2 D5.2 D10.2 D11.2 R1.2 R8V.2 U38.8 | length 281.8
  Top Layer w0.635: v1@-48.97,14.491 -48.374,15.087 v1(-39.542,15.087) ; v1@-37.236,20.92 -37.985,21.669 -37.985,23.856 -34.336,27.505 -34.336,30.754 -38.752,35.17 -38.752,36.94 -34.398,41.294 -34.398,45.426 -30.768,49.055 -30.768,50.712 -28.803,52.677 -12.74,52.677 -6.978,46.914 -6.978,44.619 C2.1@-5.478,43.119 -2.087,43.119 -1.223,42.256 -1.223,36.541 -2.462,35.301 R1.2@-2.751,35.301 -4.844,33.208 -4.844,32.354 -2.976,30.486 -2.316,30.486 -1.355,29.524 D1.1@2.007,29.524 12.066,29.524 v1@15.038,32.497 ; -23.293,-15.246 v1@-23.293,-13.29 ; v1(0.853,-8.103) 1.079,-8.33 1.593,-8.33 1.599,-8.324 6.477,-8.324 7.534,-9.381 11.112,-9.381 11.565,-9.835 12.743,-9.835 13.061,-10.152 14.589,-10.152 21.489,-17.051 21.489,-25.356 D11.2@21.44,-25.405
  Top Layer w1.27: U38.8@-7.16,3.775 -6.615,4.32 C18.1@-3.83,4.32 -3.83,2.829 v1(-4.256,2.402) ; D11.2@21.44,-25.405 D5.2@25.44,-25.405 ; v1(26.012,38.54) 26.371,38.18 D4.2@29.47,38.18 ; D4.2@29.485,38.165 D10.2@33.545,38.165
  Bottom Layer w0.635: v1(-49.014,14.623) -48.809,14.418 -48.809,14.002 -48.623,13.815 -41.876,13.815 -37.306,9.245 -32.21,9.245 -31.726,8.762 -31.726,8.529 -31.268,8.07 -31.268,8 -30.339,7.071 -30.268,7.071 -30.161,6.963 -30.161,6.758 -30.036,6.633 -28.02,6.633 -28.006,6.647 -27.059,6.647 -27.045,6.633 -25.836,6.633 -25.607,6.862 -24.661,6.862 -24.432,6.633 -23.786,6.633 -22.941,7.478 -20.615,7.478 ; v1@-39.343,15.154 -36.909,17.588 v1(-36.909,21.314) ; v1@-23.584,-13.448 -26.885,-10.148 -26.885,-3.398 -21.129,2.357 -21.129,4.301 -20.615,4.816 -20.615,7.478 ; -12.9,5.984 -12.9,6.337 ; v1(-4.256,2.402) -4.256,3.874 -5.792,5.409 -11.972,5.409 -12.9,6.337 ; v1@-3.95,2.526 -1.823,2.526 0.835,-0.132 v1@0.835,-8.121 ; v1(15.121,32.331) 15.121,34.443 18.075,37.396 25.03,37.396 v1@26.174,38.54 ; -20.615,7.478 -19.45,7.478 -19.284,7.644 -17.352,7.644 -17.294,7.702 -14.265,7.702 -12.9,6.337
  other v1: -23.407,-13.271
"VOLTAGE DIVIDER": R37.1 R38.2 U36.2 U36.6 | length 9.8
  Top Layer w0.305: U36.2@2.78,-19.31 3.52,-19.31 4.02,-19.81 U36.6@5.68,-19.81 9.731,-19.81 R38.2@9.738,-19.803
  Top Layer w0.635: R37.1@8.94,-22.095 9.738,-21.297 R38.2@9.738,-19.803
pads on no net: "Capteur exte 4.6" "RJ12- 2." AP7331.4 MicroController1.1 MicroController1.4 MicroController1.6 MicroController1.7 MicroController1.8 MicroController1.9 MicroController1.14 MicroController1.19 MicroController1.27 MicroController1.28 MicroController1.29 MicroController1.36 MicroController1.38 MicroController1.39 MicroController1.47 MicroController1.48 MicroController1.49 MicroController1.50 MicroController1.54 MicroController1.56 MicroController1.65 MicroController1.66 MicroController1.67 MicroController1.68 MicroController1.69 MicroController1.71 MicroController1.72 MicroController1.73 MicroController1.79 MicroController1.89 RJ12-1. U31.dout U39.4 U40.5 U40.6 U40.7 U40.12 U40.14 U40.18 U40.19 U40.20 U40.21 U40.22 U40.23 U40.25 U40.26 U41.1 U41.2 U41.3 U41.4 U41.5 U41.6 U41.7 U41.9 U41.10 U41.11 U41.12 U41.13 U41.14 U41.16 U41.17 U41.18 U41.19 U41.20

## Keep-outs
Keep-Out Layer:
  rectangle: -167.037,-99.743 -162.037,100.257
  rectangle: -162.037,-99.743 127.963,-94.743
  rectangle: -162.037,95.257 122.963,100.257

## Silkscreen, mask and mechanical layers (free items; w line width, h text height)
Top Overlay:
  text "WIFI" at -7.672,51.691 h4
  text "TX ROBOTIC / ISEN" at -23.633,6.559 h3
Bottom Overlay:
  lines w0.254: -32.5,-24.5 32.5,-24.5
  text "SCSFTLMLF" at 9.257,52.189 h1.52
  text "CF" at 6.102,46.21 h5
Mechanical 1:
  lines w0.254: -64.118,7.013 cw(c0,0) 64.118,7.013 ; -64.105,7 -32.5,7 -32.5,-55.5 ; -32.5,-56.144 -32.5,-54.5 ; -32.485,-56.162 ccw(c0,0) 32.472,-56.169 32.5,-56.141 32.5,-54.5 32.5,-56 ; 32.5,-55.5 32.5,7 64.105,7

## Text inside footprints (layer, text, board x,y; h text height)
Buzz: Bottom Overlay "+" at -23.932,56.695 h1.52 r90
U39: Top Overlay "End of PCB" at -3.576,-64.941 h0.5